# EAGLE board ProjectCanaryV3.0 (EAGLE 8.6.0)

Size 127.12 x 63.49 mm. Coordinates in mm from the lower left corner, seen from the top.
Outline: 0,0 127.12,0 127.12,63.49 0,63.49 0,0
Copper layers (1*16): Top 0.035mm / dielectric 1.5mm / Bottom 0.035mm
Design rules "default": minimum track width 6mil, minimum drill 0.35mm, track to track 6mil, track to pad 6mil, pad to pad 6mil, via to via 6mil, smd to smd 6mil, copper to edge 40mil, drill to drill 6mil, minimum pad ring 10mil, minimum via ring 8mil, stop-mask expansion 4mil, vias tented up to drill 0mil, thermal gap 10mil

## Footprints (pad centres in the part's own frame; a part is rotated, then mirrored left to right if it is on the bottom)
1X08 = drill 1.016 pad 1.88: 1 0,0; 2 2.54,0; 3 5.08,0; 4 7.62,0; 5 10.16,0; 6 12.7,0; 7 15.24,0; 8 17.78,0
C0805 = smd 1.3 x 1.5: 1 -0.85,0; 2 0.85,0
C0504 = smd 1 x 1.3: 1 -0.7,0; 2 0.7,0
86SMX = smd 2.286 x 2.184: 1 -5.08,-2.286; 4 -5.08,2.286 | smd 3.556 x 2.184: 2 4.318,-2.286; 3 4.318,2.286
XBEE = drill 0.8 pad 1.524: 1 -11,20; 2 -11,18; 3 -11,16; 4 -11,14; 5 -11,12; 6 -11,10; 7 -11,8; 8 -11,6; 9 -11,4; 10 -11,2; 11 11,2; 12 11,4; 13 11,6; 14 11,8; 15 11,10; 16 11,12; 17 11,14; 18 11,16; 19 11,18; 20 11,20
1X04 = drill 1.016 pad 1.88: 1 0,0; 2 2.54,0; 3 5.08,0; 4 7.62,0
TQFP44 = smd 1.5 x 0.5: 1 -5.8,4; 2 -5.8,3.2; 3 -5.8,2.4; 4 -5.8,1.6; 5 -5.8,0.8; 6 -5.8,0; 7 -5.8,-0.8; 8 -5.8,-1.6; 9 -5.8,-2.4; 10 -5.8,-3.2; 11 -5.8,-4; 23 5.8,-4; 24 5.8,-3.2; 25 5.8,-2.4; 26 5.8,-1.6; 27 5.8,-0.8; 28 5.8,0; 29 5.8,0.8; 30 5.8,1.6; 31 5.8,2.4; 32 5.8,3.2; 33 5.8,4 | smd 0.5 x 1.5: 12 -4,-5.8; 13 -3.2,-5.8; 14 -2.4,-5.8; 15 -1.6,-5.8; 16 -0.8,-5.8; 17 0,-5.8; 18 0.8,-5.8; 19 1.6,-5.8; 20 2.4,-5.8; 21 3.2,-5.8; 22 4,-5.8; 34 4,5.8; 35 3.2,5.8; 36 2.4,5.8; 37 1.6,5.8; 38 0.8,5.8; 39 0,5.8; 40 -0.8,5.8; 41 -1.6,5.8; 42 -2.4,5.8; 43 -3.2,5.8; 44 -4,5.8
2X5 = drill 1.016 pad 1.88: 1 0,0; 2 0,2.54; 3 2.54,0; 4 2.54,2.54; 5 5.08,0; 6 5.08,2.54; 7 7.62,0; 8 7.62,2.54; 9 10.16,0; 10 10.16,2.54
L1812 = smd 1.9 x 3.4: 1 -1.95,0; 2 1.95,0
CHIP-LED0805 = smd 1.2 x 1.2: A 0,-1.05; C 0,1.05
1X06 = drill 1.016 octagon: 1 -6.35,0; 2 -3.81,0; 3 -1.27,0; 4 1.27,0; 5 3.81,0; 6 6.35,0
STAND-OFF = hole 3.302: 0,0
DCJACK_2MM_PTH = drill 2.8: GND 0,7.35; GNDBREAK 4.8,10.75 | drill 3.2: PWR 0,13.6
M0805 = smd 1.3 x 1.6: 1 -0.95,0; 2 0.95,0
TO220-IGO = drill 1 pad 1.88: GND 0,0; OUT 2.54,0 | drill 1 pad 1.88 square: IN -2.54,0
PUSHBUTTON_SMD_SJ = smd 2 x 2: P$1 3,0; P$2 -3,0
FB = drill 0.8 pad 1.93: P$1 -2.5,0; P$2 2.5,0

## Placement (x,y rotation side)
BME280-HEADER  [1X08]  92.71,33.02 90 top
C1  1uF  [C0805]  53,19.55 0 top
C2  22uF  [C0805]  52.07,13.97 90 top
C3  10uF  [C0805]  20.32,6.35 90 top
C4  10uF  [C0805]  58.11,13.35 0 top
C5  22pF  [C0805]  35.56,39.37 0 top
C6  22pF  [C0805]  35.56,43.18 0 top
C7  680uF  [C0805]  115.57,45.72 90 top
C8  0.1uF  [C0805]  59.69,55.88 0 top
C9  0.1uF  [C0805]  114.3,55.88 0 top
C10  0.1uF  [C0805]  95.25,55.88 0 top
C11  0.1uF  [C0805]  41.91,55.88 0 top
C12  0.1uF  [C0805]  16.51,55.88 0 top
C13  0.1uF  [C0805]  77.47,55.88 0 top
C14  0.1uF  [C0805]  81.28,36.83 90 top
C15  0.1uF  [C0504]  -17.78,55.88 0 top  (outside the outline)
C16  0.1uF  [C0504]  -24.13,55.88 0 top  (outside the outline)
C17  0.1uF  [C0504]  -30.48,55.88 0 top  (outside the outline)
C18  0.1uF  [C0504]  -36.83,55.88 0 top  (outside the outline)
C19  0.1uF  [C0504]  -43.18,55.88 0 top  (outside the outline)
C20  0.1uF  [C0504]  83.82,49.53 0 top
C21  100nF  [C0805]  69.85,33.02 0 top
C22  100nF  [C0805]  73.66,50.8 0 top
C23  100nF  [C0805]  63.5,39.37 90 top
C24  100nF  [C0805]  44.45,5.08 0 top
C25  0.1uF  [C0805]  87.63,45.72 0 top
CLOCK  20MHz  [86SMX]  47.39,41.17 0 top
DATA-RADIO  [XBEE]  110.49,15.24 90 top
GAS-SENSOR0  [1X04]  110.49,59.69 0 top
GAS-SENSOR1  [1X04]  91.44,59.69 0 top
GAS-SENSOR2  [1X04]  73.66,59.69 0 top
GAS-SENSOR3  [1X04]  55.88,59.69 0 top
GAS-SENSOR4  [1X04]  38.1,59.69 0 top
GAS-SENSOR5  [1X04]  12.7,59.69 0 top
GPS-HEADER  [1X04]  120.65,27.94 90 top
IC2  ATMEGA324PA  [TQFP44]  72.39,41.91 0 top
JTAG-HEADER  [2X5]  12.7,39.37 90 top
L1  10uH  [L1812]  21.59,12.7 0 top
LED1  [CHIP-LED0805]  16.51,15.24 0 top
LED2  [CHIP-LED0805]  12.7,15.24 0 top
LED3  RED  [CHIP-LED0805]  11.43,33.02 90 top
LED4  GREEN  [CHIP-LED0805]  11.26,29.5 90 top
LED5  BLUE  [CHIP-LED0805]  11.34,26.09 90 top
LIDAR-HEADER  [1X06]  120.65,46.99 90 top
MOUNT-HOLE1  STAND-OFF  [STAND-OFF]  53.34,29.21 0 top
MOUNT-HOLE2  STAND-OFF  [STAND-OFF]  78.74,27.94 0 top
MOUNT-HOLE3  STAND-OFF  [STAND-OFF]  66.04,15.24 0 top
POWER  15.5V  [DCJACK_2MM_PTH]  17.78,6.35 90 top
R1  400k +/-1%  [M0805]  25.4,2.54 0 top
R2  100k +/- 1%  [M0805]  33.02,3.81 90 top
R3  1k  [M0805]  16.51,20.32 90 top
R4  1k  [M0805]  12.7,20.32 90 top
R5  1k  [M0805]  6.35,33.02 0 top
R6  1k  [M0805]  6.43,29.55 0 top
R7  1k  [M0805]  6.34,26.14 0 top
R8  4.7k  [M0805]  76.2,15.24 0 top
R9  4.7k  [M0805]  76.2,20.32 0 top
R10  4.7K  [M0805]  59.69,6.35 0 top
R11  330  [M0805]  63.5,44.45 90 top
REGULATOR  3.3V  [TO220-IGO]  38.1,31.75 0 top
RESET-SW  [PUSHBUTTON_SMD_SJ]  52.07,5.08 0 top
SD-HEADER  [1X08]  24.13,34.29 90 top
START  [PUSHBUTTON_SMD_SJ]  6.35,17.78 0 top
SWITCHING-REGULATOR  5V  [TO220-IGO]  38.1,11.43 180 top
U$1  FB  [FB]  83.82,41.91 0 top

## Library data of the parts
BME280-HEADER SD-HEADER = SparkFun-Connectors; PROD_ID: CONN-08438
C1-C14 C21-C25 LED1-LED5 LIDAR-HEADER POWER R1-R11 RESET-SW START U$1 = adafruit
C15-C20 = eagle-ltspice; SPICEMODEL: NONE; SPICEPREFIX: C
CLOCK = adafruit; OC_FARNELL: 6344860; OC_NEWARK: unknown
DATA-RADIO = SparkFun-RF
GAS-SENSOR0 GAS-SENSOR1-GAS-SENSOR5 GPS-HEADER = SparkFun-Connectors; PROD_ID: CONN-09696
IC2 = atmel; MPN: ATMEGA644PV-10AU; OC_FARNELL: 1455123; OC_NEWARK: 58M3748
JTAG-HEADER = SparkFun-Connectors; PROD_ID: CONN-08499; SF_ID: PRT-0778
L1 = eagle-ltspice; SPICEMODEL: NONE; SPICEPREFIX: L
MOUNT-HOLE1-MOUNT-HOLE3 = SparkFun-Hardware
REGULATOR SWITCHING-REGULATOR = SparkFun-IC-Power

## Nets
3.3V: C1.1 DATA-RADIO.1 GPS-HEADER.4 LED1.A R8.2 R9.2 REGULATOR.OUT SD-HEADER.1
5V: BME280-HEADER.1 C2.1 C4.1 C7.1 C8.1 C9.1 C10.1 C11.1 C12.1 C13.1 C25.1 GAS-SENSOR0.4 GAS-SENSOR1.4 GAS-SENSOR2.4 GAS-SENSOR3.4 GAS-SENSOR4.4 GAS-SENSOR5.4 IC2.27 JTAG-HEADER.4 LED2.A LIDAR-HEADER.1 REGULATOR.IN SWITCHING-REGULATOR.OUT U$1.P$1
GND: BME280-HEADER.3 C1.2 C2.2 C3.2 C4.2 C5.2 C6.2 C7.2 C8.2 C9.2 C10.2 C11.2 C12.2 C13.2 C14.2 C15.2 C16.2 C17.2 C18.2 C19.2 C20.2 C21.2 C22.2 C23.2 C24.2 C25.2 DATA-RADIO.10 GAS-SENSOR0.1 GAS-SENSOR1.1 GAS-SENSOR2.1 GAS-SENSOR3.1 GAS-SENSOR4.1 GAS-SENSOR5.1 GPS-HEADER.3 IC2.6 IC2.18 IC2.28 IC2.39 JTAG-HEADER.2 JTAG-HEADER.10 LIDAR-HEADER.6 POWER.GND R2.1 R3.1 R4.1 R5.1 R6.1 R7.1 R11.2 REGULATOR.GND SD-HEADER.7 START.P$2 SWITCHING-REGULATOR.GND
GNDBREAK: POWER.GNDBREAK
N$1: C3.1 L1.2 R1.2 SWITCHING-REGULATOR.IN
N$2: LED1.C R3.2
N$3: LED2.C R4.2
N$4: LED3.C R5.2
N$5: LED4.C R6.2
N$6: LED5.C R7.2
N$7: IC2.43 START.P$1
N$8: C6.1 CLOCK.4 IC2.7
N$9: U$1.P$2
N$10: GPS-HEADER.1 IC2.12
N$11: GPS-HEADER.2 IC2.11
N$12: C20.1 GAS-SENSOR0.2 IC2.37
N$13: IC2.25 LIDAR-HEADER.2
N$14: IC2.24 JTAG-HEADER.9
N$15: C14.1 IC2.29
N$16: C19.1 GAS-SENSOR1.2 IC2.36
N$17: C18.1 GAS-SENSOR2.2 IC2.35
N$18: C17.1 GAS-SENSOR3.2 IC2.34
N$19: C16.1 GAS-SENSOR4.2 IC2.33
N$20: C15.1 GAS-SENSOR5.2 IC2.32
N$21: BME280-HEADER.4 IC2.19 LIDAR-HEADER.4 R8.1
N$22: L1.1 POWER.PWR
N$23: IC2.23 JTAG-HEADER.3
N$24: BME280-HEADER.6 IC2.20 LIDAR-HEADER.5 R9.1
N$25: IC2.22 JTAG-HEADER.5
N$26: DATA-RADIO.3 IC2.10
N$27: DATA-RADIO.2 IC2.9
N$28: IC2.21 JTAG-HEADER.1
N$29: C21.1 C22.1 C23.1 IC2.5 IC2.17 IC2.38
N$30: R11.1 RESET-SW.P$1
N$31: R10.1
N$32: C5.1 CLOCK.1 IC2.8
RESET: C24.1 IC2.4 JTAG-HEADER.6 R10.2 RESET-SW.P$2
SD-CD: IC2.26 SD-HEADER.6
SD-CS: IC2.44 SD-HEADER.2
SD-DI: IC2.1 SD-HEADER.3
SD-DO: IC2.2 SD-HEADER.5
SD-SCK: IC2.3 SD-HEADER.4
STATUS-B: IC2.42 LED5.A
STATUS-G: IC2.41 LED4.A
STATUS-R: IC2.40 LED3.A
VOLTMETER: IC2.30 R1.1 R2.2

## Tracks (layer width: path | path; a pad name or v marks a point on that pad's centre or on a via)
3.3V  (7 unrouted)
5V  (23 unrouted)
GND  (52 unrouted)
N$1  (3 unrouted)
N$2  (1 unrouted)
N$3  (1 unrouted)
N$4  (1 unrouted)
N$5  (1 unrouted)
N$6  (1 unrouted)
N$7  (1 unrouted)
N$8  (2 unrouted)
N$10  (1 unrouted)
N$11  (1 unrouted)
N$12  (2 unrouted)
N$13  (1 unrouted)
N$14  (1 unrouted)
N$15  (1 unrouted)
N$16  (2 unrouted)
N$17  (2 unrouted)
N$18  (2 unrouted)
N$19  (2 unrouted)
N$20  (2 unrouted)
N$21  (3 unrouted)
N$22  (1 unrouted)
N$23  (1 unrouted)
N$24  (3 unrouted)
N$25  (1 unrouted)
N$26  (1 unrouted)
N$27  (1 unrouted)
N$28  (1 unrouted)
N$29  (5 unrouted)
N$30  (1 unrouted)
N$32  (2 unrouted)
RESET  (4 unrouted)
SD-CD  (1 unrouted)
SD-CS  (1 unrouted)
SD-DI  (1 unrouted)
SD-DO  (1 unrouted)
SD-SCK  (1 unrouted)
STATUS-B  (1 unrouted)
STATUS-G  (1 unrouted)
STATUS-R  (1 unrouted)
VOLTMETER  (2 unrouted)